# EAGLE board DP6037_protoboard.v1 (EAGLE 5.07)

Size 60 x 37 mm. Coordinates in mm from the lower left corner, seen from the top.
Copper layers (1*16): Top 0.035mm / dielectric 1.5mm / Bottom 0.035mm
Design rules "SparkFun": minimum track width 8mil, minimum drill 20mil, track to track 8mil, track to pad 8mil, pad to pad 8mil, via to via 8mil, smd to smd 8mil, copper to edge 10mil, drill to drill 8mil, minimum pad ring 12mil, minimum via ring 10mil, stop-mask expansion 4mil, vias tented up to drill 25mil, thermal gap 10mil

## Footprints (pad centres in the part's own frame; a part is rotated, then mirrored left to right if it is on the bottom)
M1X2_10_17 = drill 1 pad 1.7 square: 1 0,0
DP6037_V1 = hole 3.2: 4,4; 56,4; 56,33; 4,33

## Placement (x,y rotation side)
J1  CON_HEADER_1X01-PTH_10_17  [M1X2_10_17]  4.6,9.61 0 top
J2  CON_HEADER_1X01-PTH_10_17  [M1X2_10_17]  4.6,12.15 0 top
J3  CON_HEADER_1X01-PTH_10_17  [M1X2_10_17]  4.6,14.69 0 top
J4  CON_HEADER_1X01-PTH_10_17  [M1X2_10_17]  4.6,17.23 0 top
J5  CON_HEADER_1X01-PTH_10_17  [M1X2_10_17]  4.6,19.77 0 top
J6  CON_HEADER_1X01-PTH_10_17  [M1X2_10_17]  4.6,22.31 0 top
J7  CON_HEADER_1X01-PTH_10_17  [M1X2_10_17]  4.6,24.85 0 top
J8  CON_HEADER_1X01-PTH_10_17  [M1X2_10_17]  4.6,27.39 0 top
J9  CON_HEADER_1X01-PTH_10_17  [M1X2_10_17]  7.14,9.61 0 top
J10  CON_HEADER_1X01-PTH_10_17  [M1X2_10_17]  7.14,12.15 0 top
J11  CON_HEADER_1X01-PTH_10_17  [M1X2_10_17]  7.14,14.69 0 top
J12  CON_HEADER_1X01-PTH_10_17  [M1X2_10_17]  7.14,17.23 0 top
J13  CON_HEADER_1X01-PTH_10_17  [M1X2_10_17]  7.14,19.77 0 top
J14  CON_HEADER_1X01-PTH_10_17  [M1X2_10_17]  7.14,22.31 0 top
J15  CON_HEADER_1X01-PTH_10_17  [M1X2_10_17]  7.14,24.85 0 top
J16  CON_HEADER_1X01-PTH_10_17  [M1X2_10_17]  7.14,27.39 0 top
J17  CON_HEADER_1X01-PTH_10_17  [M1X2_10_17]  9.68,4.53 0 top
J18  CON_HEADER_1X01-PTH_10_17  [M1X2_10_17]  9.68,7.07 0 top
J19  CON_HEADER_1X01-PTH_10_17  [M1X2_10_17]  9.68,9.61 0 top
J20  CON_HEADER_1X01-PTH_10_17  [M1X2_10_17]  9.68,12.15 0 top
J21  CON_HEADER_1X01-PTH_10_17  [M1X2_10_17]  9.68,14.69 0 top
J22  CON_HEADER_1X01-PTH_10_17  [M1X2_10_17]  9.68,17.23 0 top
J23  CON_HEADER_1X01-PTH_10_17  [M1X2_10_17]  9.68,19.77 0 top
J24  CON_HEADER_1X01-PTH_10_17  [M1X2_10_17]  9.68,22.31 0 top
J25  CON_HEADER_1X01-PTH_10_17  [M1X2_10_17]  9.68,24.85 0 top
J26  CON_HEADER_1X01-PTH_10_17  [M1X2_10_17]  9.68,27.39 0 top
J27  CON_HEADER_1X01-PTH_10_17  [M1X2_10_17]  9.68,29.93 0 top
J28  CON_HEADER_1X01-PTH_10_17  [M1X2_10_17]  9.68,32.47 0 top
J29  CON_HEADER_1X01-PTH_10_17  [M1X2_10_17]  12.22,4.53 0 top
J30  CON_HEADER_1X01-PTH_10_17  [M1X2_10_17]  12.22,7.07 0 top
J31  CON_HEADER_1X01-PTH_10_17  [M1X2_10_17]  12.22,9.61 0 top
J32  CON_HEADER_1X01-PTH_10_17  [M1X2_10_17]  12.22,12.15 0 top
J33  CON_HEADER_1X01-PTH_10_17  [M1X2_10_17]  12.22,14.69 0 top
J34  CON_HEADER_1X01-PTH_10_17  [M1X2_10_17]  12.22,17.23 0 top
J35  CON_HEADER_1X01-PTH_10_17  [M1X2_10_17]  12.22,19.77 0 top
J36  CON_HEADER_1X01-PTH_10_17  [M1X2_10_17]  12.22,22.31 0 top
J37  CON_HEADER_1X01-PTH_10_17  [M1X2_10_17]  12.22,24.85 0 top
J38  CON_HEADER_1X01-PTH_10_17  [M1X2_10_17]  12.22,27.39 0 top
J39  CON_HEADER_1X01-PTH_10_17  [M1X2_10_17]  12.22,29.93 0 top
J40  CON_HEADER_1X01-PTH_10_17  [M1X2_10_17]  12.22,32.47 0 top
J41  CON_HEADER_1X01-PTH_10_17  [M1X2_10_17]  14.76,4.53 0 top
J42  CON_HEADER_1X01-PTH_10_17  [M1X2_10_17]  14.76,7.07 0 top
J43  CON_HEADER_1X01-PTH_10_17  [M1X2_10_17]  14.76,9.61 0 top
J44  CON_HEADER_1X01-PTH_10_17  [M1X2_10_17]  14.76,12.15 0 top
J45  CON_HEADER_1X01-PTH_10_17  [M1X2_10_17]  14.76,14.69 0 top
J46  CON_HEADER_1X01-PTH_10_17  [M1X2_10_17]  14.76,17.23 0 top
J47  CON_HEADER_1X01-PTH_10_17  [M1X2_10_17]  14.76,19.77 0 top
J48  CON_HEADER_1X01-PTH_10_17  [M1X2_10_17]  14.76,22.31 0 top
J49  CON_HEADER_1X01-PTH_10_17  [M1X2_10_17]  14.76,24.85 0 top
J50  CON_HEADER_1X01-PTH_10_17  [M1X2_10_17]  14.76,27.39 0 top
J51  CON_HEADER_1X01-PTH_10_17  [M1X2_10_17]  14.76,29.93 0 top
J52  CON_HEADER_1X01-PTH_10_17  [M1X2_10_17]  14.76,32.47 0 top
J53  CON_HEADER_1X01-PTH_10_17  [M1X2_10_17]  17.3,4.53 0 top
J54  CON_HEADER_1X01-PTH_10_17  [M1X2_10_17]  17.3,7.07 0 top
J55  CON_HEADER_1X01-PTH_10_17  [M1X2_10_17]  17.3,9.61 0 top
J56  CON_HEADER_1X01-PTH_10_17  [M1X2_10_17]  17.3,12.15 0 top
J57  CON_HEADER_1X01-PTH_10_17  [M1X2_10_17]  17.3,14.69 0 top
J58  CON_HEADER_1X01-PTH_10_17  [M1X2_10_17]  17.3,17.23 0 top
J59  CON_HEADER_1X01-PTH_10_17  [M1X2_10_17]  17.3,19.77 0 top
J60  CON_HEADER_1X01-PTH_10_17  [M1X2_10_17]  17.3,22.31 0 top
J61  CON_HEADER_1X01-PTH_10_17  [M1X2_10_17]  17.3,24.85 0 top
J62  CON_HEADER_1X01-PTH_10_17  [M1X2_10_17]  17.3,27.39 0 top
J63  CON_HEADER_1X01-PTH_10_17  [M1X2_10_17]  17.3,29.93 0 top
J64  CON_HEADER_1X01-PTH_10_17  [M1X2_10_17]  17.3,32.47 0 top
J65  CON_HEADER_1X01-PTH_10_17  [M1X2_10_17]  19.84,4.53 0 top
J66  CON_HEADER_1X01-PTH_10_17  [M1X2_10_17]  19.84,7.07 0 top
J67  CON_HEADER_1X01-PTH_10_17  [M1X2_10_17]  19.84,9.61 0 top
J68  CON_HEADER_1X01-PTH_10_17  [M1X2_10_17]  19.84,12.15 0 top
J69  CON_HEADER_1X01-PTH_10_17  [M1X2_10_17]  19.84,14.69 0 top
J70  CON_HEADER_1X01-PTH_10_17  [M1X2_10_17]  19.84,17.23 0 top
J71  CON_HEADER_1X01-PTH_10_17  [M1X2_10_17]  19.84,19.77 0 top
J72  CON_HEADER_1X01-PTH_10_17  [M1X2_10_17]  19.84,22.31 0 top
J73  CON_HEADER_1X01-PTH_10_17  [M1X2_10_17]  19.84,24.85 0 top
J74  CON_HEADER_1X01-PTH_10_17  [M1X2_10_17]  19.84,27.39 0 top
J75  CON_HEADER_1X01-PTH_10_17  [M1X2_10_17]  19.84,29.93 0 top
J76  CON_HEADER_1X01-PTH_10_17  [M1X2_10_17]  19.84,32.47 0 top
J77  CON_HEADER_1X01-PTH_10_17  [M1X2_10_17]  22.38,4.53 0 top
J78  CON_HEADER_1X01-PTH_10_17  [M1X2_10_17]  22.38,7.07 0 top
J79  CON_HEADER_1X01-PTH_10_17  [M1X2_10_17]  22.38,9.61 0 top
J80  CON_HEADER_1X01-PTH_10_17  [M1X2_10_17]  22.38,12.15 0 top
J81  CON_HEADER_1X01-PTH_10_17  [M1X2_10_17]  22.38,14.69 0 top
J82  CON_HEADER_1X01-PTH_10_17  [M1X2_10_17]  22.38,17.23 0 top
J83  CON_HEADER_1X01-PTH_10_17  [M1X2_10_17]  22.38,19.77 0 top
J84  CON_HEADER_1X01-PTH_10_17  [M1X2_10_17]  22.38,22.31 0 top
J85  CON_HEADER_1X01-PTH_10_17  [M1X2_10_17]  22.38,24.85 0 top
J86  CON_HEADER_1X01-PTH_10_17  [M1X2_10_17]  22.38,27.39 0 top
J87  CON_HEADER_1X01-PTH_10_17  [M1X2_10_17]  22.38,29.93 0 top
J88  CON_HEADER_1X01-PTH_10_17  [M1X2_10_17]  22.38,32.47 0 top
J89  CON_HEADER_1X01-PTH_10_17  [M1X2_10_17]  24.92,4.53 0 top
J90  CON_HEADER_1X01-PTH_10_17  [M1X2_10_17]  24.92,7.07 0 top
J91  CON_HEADER_1X01-PTH_10_17  [M1X2_10_17]  24.92,9.61 0 top
J92  CON_HEADER_1X01-PTH_10_17  [M1X2_10_17]  24.92,12.15 0 top
J93  CON_HEADER_1X01-PTH_10_17  [M1X2_10_17]  24.92,14.69 0 top
J94  CON_HEADER_1X01-PTH_10_17  [M1X2_10_17]  24.92,17.23 0 top
J95  CON_HEADER_1X01-PTH_10_17  [M1X2_10_17]  24.92,19.77 0 top
J96  CON_HEADER_1X01-PTH_10_17  [M1X2_10_17]  24.92,22.31 0 top
J97  CON_HEADER_1X01-PTH_10_17  [M1X2_10_17]  24.92,24.85 0 top
J98  CON_HEADER_1X01-PTH_10_17  [M1X2_10_17]  24.92,27.39 0 top
J99  CON_HEADER_1X01-PTH_10_17  [M1X2_10_17]  24.92,29.93 0 top
J100  CON_HEADER_1X01-PTH_10_17  [M1X2_10_17]  24.92,32.47 0 top
J101  CON_HEADER_1X01-PTH_10_17  [M1X2_10_17]  27.46,4.53 0 top
J102  CON_HEADER_1X01-PTH_10_17  [M1X2_10_17]  27.46,7.07 0 top
J103  CON_HEADER_1X01-PTH_10_17  [M1X2_10_17]  27.46,9.61 0 top
J104  CON_HEADER_1X01-PTH_10_17  [M1X2_10_17]  27.46,12.15 0 top
J105  CON_HEADER_1X01-PTH_10_17  [M1X2_10_17]  27.46,14.69 0 top
J106  CON_HEADER_1X01-PTH_10_17  [M1X2_10_17]  27.46,17.23 0 top
J107  CON_HEADER_1X01-PTH_10_17  [M1X2_10_17]  27.46,19.77 0 top
J108  CON_HEADER_1X01-PTH_10_17  [M1X2_10_17]  27.46,22.31 0 top
J109  CON_HEADER_1X01-PTH_10_17  [M1X2_10_17]  27.46,24.85 0 top
J110  CON_HEADER_1X01-PTH_10_17  [M1X2_10_17]  27.46,27.39 0 top
J111  CON_HEADER_1X01-PTH_10_17  [M1X2_10_17]  27.46,29.93 0 top
J112  CON_HEADER_1X01-PTH_10_17  [M1X2_10_17]  27.46,32.47 0 top
J113  CON_HEADER_1X01-PTH_10_17  [M1X2_10_17]  30,4.53 0 top
J114  CON_HEADER_1X01-PTH_10_17  [M1X2_10_17]  30,7.07 0 top
J115  CON_HEADER_1X01-PTH_10_17  [M1X2_10_17]  30,9.61 0 top
J116  CON_HEADER_1X01-PTH_10_17  [M1X2_10_17]  30,12.15 0 top
J117  CON_HEADER_1X01-PTH_10_17  [M1X2_10_17]  30,14.69 0 top
J118  CON_HEADER_1X01-PTH_10_17  [M1X2_10_17]  30,17.23 0 top
J119  CON_HEADER_1X01-PTH_10_17  [M1X2_10_17]  30,19.77 0 top
J120  CON_HEADER_1X01-PTH_10_17  [M1X2_10_17]  30,22.31 0 top
J121  CON_HEADER_1X01-PTH_10_17  [M1X2_10_17]  30,24.85 0 top
J122  CON_HEADER_1X01-PTH_10_17  [M1X2_10_17]  30,27.39 0 top
J123  CON_HEADER_1X01-PTH_10_17  [M1X2_10_17]  30,29.93 0 top
J124  CON_HEADER_1X01-PTH_10_17  [M1X2_10_17]  30,32.47 0 top
J125  CON_HEADER_1X01-PTH_10_17  [M1X2_10_17]  32.54,4.53 0 top
J126  CON_HEADER_1X01-PTH_10_17  [M1X2_10_17]  32.54,7.07 0 top
J127  CON_HEADER_1X01-PTH_10_17  [M1X2_10_17]  32.54,9.61 0 top
J128  CON_HEADER_1X01-PTH_10_17  [M1X2_10_17]  32.54,12.15 0 top
J129  CON_HEADER_1X01-PTH_10_17  [M1X2_10_17]  32.54,14.69 0 top
J130  CON_HEADER_1X01-PTH_10_17  [M1X2_10_17]  32.54,17.23 0 top
J131  CON_HEADER_1X01-PTH_10_17  [M1X2_10_17]  32.54,19.77 0 top
J132  CON_HEADER_1X01-PTH_10_17  [M1X2_10_17]  32.54,22.31 0 top
J133  CON_HEADER_1X01-PTH_10_17  [M1X2_10_17]  32.54,24.85 0 top
J134  CON_HEADER_1X01-PTH_10_17  [M1X2_10_17]  32.54,27.39 0 top
J135  CON_HEADER_1X01-PTH_10_17  [M1X2_10_17]  32.54,29.93 0 top
J136  CON_HEADER_1X01-PTH_10_17  [M1X2_10_17]  32.54,32.47 0 top
J137  CON_HEADER_1X01-PTH_10_17  [M1X2_10_17]  35.08,4.53 0 top
J138  CON_HEADER_1X01-PTH_10_17  [M1X2_10_17]  35.08,7.07 0 top
J139  CON_HEADER_1X01-PTH_10_17  [M1X2_10_17]  35.08,9.61 0 top
J140  CON_HEADER_1X01-PTH_10_17  [M1X2_10_17]  35.08,12.15 0 top
J141  CON_HEADER_1X01-PTH_10_17  [M1X2_10_17]  35.08,14.69 0 top
J142  CON_HEADER_1X01-PTH_10_17  [M1X2_10_17]  35.08,17.23 0 top
J143  CON_HEADER_1X01-PTH_10_17  [M1X2_10_17]  35.08,19.77 0 top
J144  CON_HEADER_1X01-PTH_10_17  [M1X2_10_17]  35.08,22.31 0 top
J145  CON_HEADER_1X01-PTH_10_17  [M1X2_10_17]  35.08,24.85 0 top
J146  CON_HEADER_1X01-PTH_10_17  [M1X2_10_17]  35.08,27.39 0 top
J147  CON_HEADER_1X01-PTH_10_17  [M1X2_10_17]  35.08,29.93 0 top
J148  CON_HEADER_1X01-PTH_10_17  [M1X2_10_17]  35.08,32.47 0 top
J149  CON_HEADER_1X01-PTH_10_17  [M1X2_10_17]  37.62,4.53 0 top
J150  CON_HEADER_1X01-PTH_10_17  [M1X2_10_17]  37.62,7.07 0 top
J151  CON_HEADER_1X01-PTH_10_17  [M1X2_10_17]  37.62,9.61 0 top
J152  CON_HEADER_1X01-PTH_10_17  [M1X2_10_17]  37.62,12.15 0 top
J153  CON_HEADER_1X01-PTH_10_17  [M1X2_10_17]  37.62,14.69 0 top
J154  CON_HEADER_1X01-PTH_10_17  [M1X2_10_17]  37.62,17.23 0 top
J155  CON_HEADER_1X01-PTH_10_17  [M1X2_10_17]  37.62,19.77 0 top
J156  CON_HEADER_1X01-PTH_10_17  [M1X2_10_17]  37.62,22.31 0 top
J157  CON_HEADER_1X01-PTH_10_17  [M1X2_10_17]  37.62,24.85 0 top
J158  CON_HEADER_1X01-PTH_10_17  [M1X2_10_17]  37.62,27.39 0 top
J159  CON_HEADER_1X01-PTH_10_17  [M1X2_10_17]  37.62,29.93 0 top
J160  CON_HEADER_1X01-PTH_10_17  [M1X2_10_17]  37.62,32.47 0 top
J161  CON_HEADER_1X01-PTH_10_17  [M1X2_10_17]  40.16,4.53 0 top
J162  CON_HEADER_1X01-PTH_10_17  [M1X2_10_17]  40.16,7.07 0 top
J163  CON_HEADER_1X01-PTH_10_17  [M1X2_10_17]  40.16,9.61 0 top
J164  CON_HEADER_1X01-PTH_10_17  [M1X2_10_17]  40.16,12.15 0 top
J165  CON_HEADER_1X01-PTH_10_17  [M1X2_10_17]  40.16,14.69 0 top
J166  CON_HEADER_1X01-PTH_10_17  [M1X2_10_17]  40.16,17.23 0 top
J167  CON_HEADER_1X01-PTH_10_17  [M1X2_10_17]  40.16,19.77 0 top
J168  CON_HEADER_1X01-PTH_10_17  [M1X2_10_17]  40.16,22.31 0 top
J169  CON_HEADER_1X01-PTH_10_17  [M1X2_10_17]  40.16,24.85 0 top
J170  CON_HEADER_1X01-PTH_10_17  [M1X2_10_17]  40.16,27.39 0 top
J171  CON_HEADER_1X01-PTH_10_17  [M1X2_10_17]  40.16,29.93 0 top
J172  CON_HEADER_1X01-PTH_10_17  [M1X2_10_17]  40.16,32.47 0 top
J173  CON_HEADER_1X01-PTH_10_17  [M1X2_10_17]  42.7,4.53 0 top
J174  CON_HEADER_1X01-PTH_10_17  [M1X2_10_17]  42.7,7.07 0 top
J175  CON_HEADER_1X01-PTH_10_17  [M1X2_10_17]  42.7,9.61 0 top
J176  CON_HEADER_1X01-PTH_10_17  [M1X2_10_17]  42.7,12.15 0 top
J177  CON_HEADER_1X01-PTH_10_17  [M1X2_10_17]  42.7,14.69 0 top
J178  CON_HEADER_1X01-PTH_10_17  [M1X2_10_17]  42.7,17.23 0 top
J179  CON_HEADER_1X01-PTH_10_17  [M1X2_10_17]  42.7,19.77 0 top
J180  CON_HEADER_1X01-PTH_10_17  [M1X2_10_17]  42.7,22.31 0 top
J181  CON_HEADER_1X01-PTH_10_17  [M1X2_10_17]  42.7,24.85 0 top
J182  CON_HEADER_1X01-PTH_10_17  [M1X2_10_17]  42.7,27.39 0 top
J183  CON_HEADER_1X01-PTH_10_17  [M1X2_10_17]  42.7,29.93 0 top
J184  CON_HEADER_1X01-PTH_10_17  [M1X2_10_17]  42.7,32.47 0 top
J185  CON_HEADER_1X01-PTH_10_17  [M1X2_10_17]  45.24,4.53 0 top
J186  CON_HEADER_1X01-PTH_10_17  [M1X2_10_17]  45.24,7.07 0 top
J187  CON_HEADER_1X01-PTH_10_17  [M1X2_10_17]  45.24,9.61 0 top
J188  CON_HEADER_1X01-PTH_10_17  [M1X2_10_17]  45.24,12.15 0 top
J189  CON_HEADER_1X01-PTH_10_17  [M1X2_10_17]  45.24,14.69 0 top
J190  CON_HEADER_1X01-PTH_10_17  [M1X2_10_17]  45.24,17.23 0 top
J191  CON_HEADER_1X01-PTH_10_17  [M1X2_10_17]  45.24,19.77 0 top
J192  CON_HEADER_1X01-PTH_10_17  [M1X2_10_17]  45.24,22.31 0 top
J193  CON_HEADER_1X01-PTH_10_17  [M1X2_10_17]  45.24,24.85 0 top
J194  CON_HEADER_1X01-PTH_10_17  [M1X2_10_17]  45.24,27.39 0 top
J195  CON_HEADER_1X01-PTH_10_17  [M1X2_10_17]  45.24,29.93 0 top
J196  CON_HEADER_1X01-PTH_10_17  [M1X2_10_17]  45.24,32.47 0 top
J197  CON_HEADER_1X01-PTH_10_17  [M1X2_10_17]  47.78,4.53 0 top
J198  CON_HEADER_1X01-PTH_10_17  [M1X2_10_17]  47.78,7.07 0 top
J199  CON_HEADER_1X01-PTH_10_17  [M1X2_10_17]  47.78,9.61 0 top
J200  CON_HEADER_1X01-PTH_10_17  [M1X2_10_17]  47.78,12.15 0 top
J201  CON_HEADER_1X01-PTH_10_17  [M1X2_10_17]  47.78,14.69 0 top
J202  CON_HEADER_1X01-PTH_10_17  [M1X2_10_17]  47.78,17.23 0 top
J203  CON_HEADER_1X01-PTH_10_17  [M1X2_10_17]  47.78,19.77 0 top
J204  CON_HEADER_1X01-PTH_10_17  [M1X2_10_17]  47.78,22.31 0 top
J205  CON_HEADER_1X01-PTH_10_17  [M1X2_10_17]  47.78,24.85 0 top
J206  CON_HEADER_1X01-PTH_10_17  [M1X2_10_17]  47.78,27.39 0 top
J207  CON_HEADER_1X01-PTH_10_17  [M1X2_10_17]  47.78,29.93 0 top
J208  CON_HEADER_1X01-PTH_10_17  [M1X2_10_17]  47.78,32.47 0 top
J209  CON_HEADER_1X01-PTH_10_17  [M1X2_10_17]  50.32,4.53 0 top
J210  CON_HEADER_1X01-PTH_10_17  [M1X2_10_17]  50.32,7.07 0 top
J211  CON_HEADER_1X01-PTH_10_17  [M1X2_10_17]  50.32,9.61 0 top
J212  CON_HEADER_1X01-PTH_10_17  [M1X2_10_17]  50.32,12.15 0 top
J213  CON_HEADER_1X01-PTH_10_17  [M1X2_10_17]  50.32,14.69 0 top
J214  CON_HEADER_1X01-PTH_10_17  [M1X2_10_17]  50.32,17.23 0 top
J215  CON_HEADER_1X01-PTH_10_17  [M1X2_10_17]  50.32,19.77 0 top
J216  CON_HEADER_1X01-PTH_10_17  [M1X2_10_17]  50.32,22.31 0 top
J217  CON_HEADER_1X01-PTH_10_17  [M1X2_10_17]  50.32,24.85 0 top
J218  CON_HEADER_1X01-PTH_10_17  [M1X2_10_17]  50.32,27.39 0 top
J219  CON_HEADER_1X01-PTH_10_17  [M1X2_10_17]  50.32,29.93 0 top
J220  CON_HEADER_1X01-PTH_10_17  [M1X2_10_17]  50.32,32.47 0 top
J221  CON_HEADER_1X01-PTH_10_17  [M1X2_10_17]  52.86,9.61 0 top
J222  CON_HEADER_1X01-PTH_10_17  [M1X2_10_17]  52.86,12.15 0 top
J223  CON_HEADER_1X01-PTH_10_17  [M1X2_10_17]  52.86,14.69 0 top
J224  CON_HEADER_1X01-PTH_10_17  [M1X2_10_17]  52.86,17.23 0 top
J225  CON_HEADER_1X01-PTH_10_17  [M1X2_10_17]  52.86,19.77 0 top
J226  CON_HEADER_1X01-PTH_10_17  [M1X2_10_17]  52.86,22.31 0 top
J227  CON_HEADER_1X01-PTH_10_17  [M1X2_10_17]  52.86,24.85 0 top
J228  CON_HEADER_1X01-PTH_10_17  [M1X2_10_17]  52.86,27.39 0 top
J229  CON_HEADER_1X01-PTH_10_17  [M1X2_10_17]  55.4,9.61 0 top
J230  CON_HEADER_1X01-PTH_10_17  [M1X2_10_17]  55.4,12.15 0 top
J231  CON_HEADER_1X01-PTH_10_17  [M1X2_10_17]  55.4,14.69 0 top
J232  CON_HEADER_1X01-PTH_10_17  [M1X2_10_17]  55.4,17.23 0 top
J233  CON_HEADER_1X01-PTH_10_17  [M1X2_10_17]  55.4,19.77 0 top
J234  CON_HEADER_1X01-PTH_10_17  [M1X2_10_17]  55.4,22.31 0 top
J235  CON_HEADER_1X01-PTH_10_17  [M1X2_10_17]  55.4,24.85 0 top
J236  CON_HEADER_1X01-PTH_10_17  [M1X2_10_17]  55.4,27.39 0 top
PCB1  PCB_DP_RECTANGLE-37X60  [DP6037_V1]  0,0 0 top
U$1  FRAME_DINA4_L  [DP_LOGO]  0.79,-6.9 0 top  (outside the outline)
U$8  [DP_LOGO]  11.02,0.7 0 top
U$9  [OSHW_8X100_NOTEXT]  0.52,28.95 270 top

## Library data of the parts
J1-J236 PCB1 = dp_devices
U$1 = dp_devices; FF1: fulfillment by; FF2: Seeed Studio; FF3: www.seeedstudio.com; LICENSE: CC-0; PROJECT: 60x37mm Protoboard v1; URL1: http://; URL2: DangerousPrototypes.com
U$8 = mydp_devices
U$9 = ohw-logo

## Text on the board
tPlace: 60x37mm Protoboard v1 | CC-0 | JUL 2012 | Dangerous Prototypes | http://dangerousprototypes.com
bPlace: Fulfillment by: Seeed Studio | www.seeedstudio.com